# Altium PCB PCB_layout.PcbDoc
Units mil, origin at the board's own origin, x right, y up, seen from the top; angles counter-clockwise.
Board outline 2840 x 2445 mil, 2 copper layers (Top Layer, Bottom Layer); 26 components, 33 nets, 114 pads, 12 vias.
Unrouted connection lines stored in the file: 1.
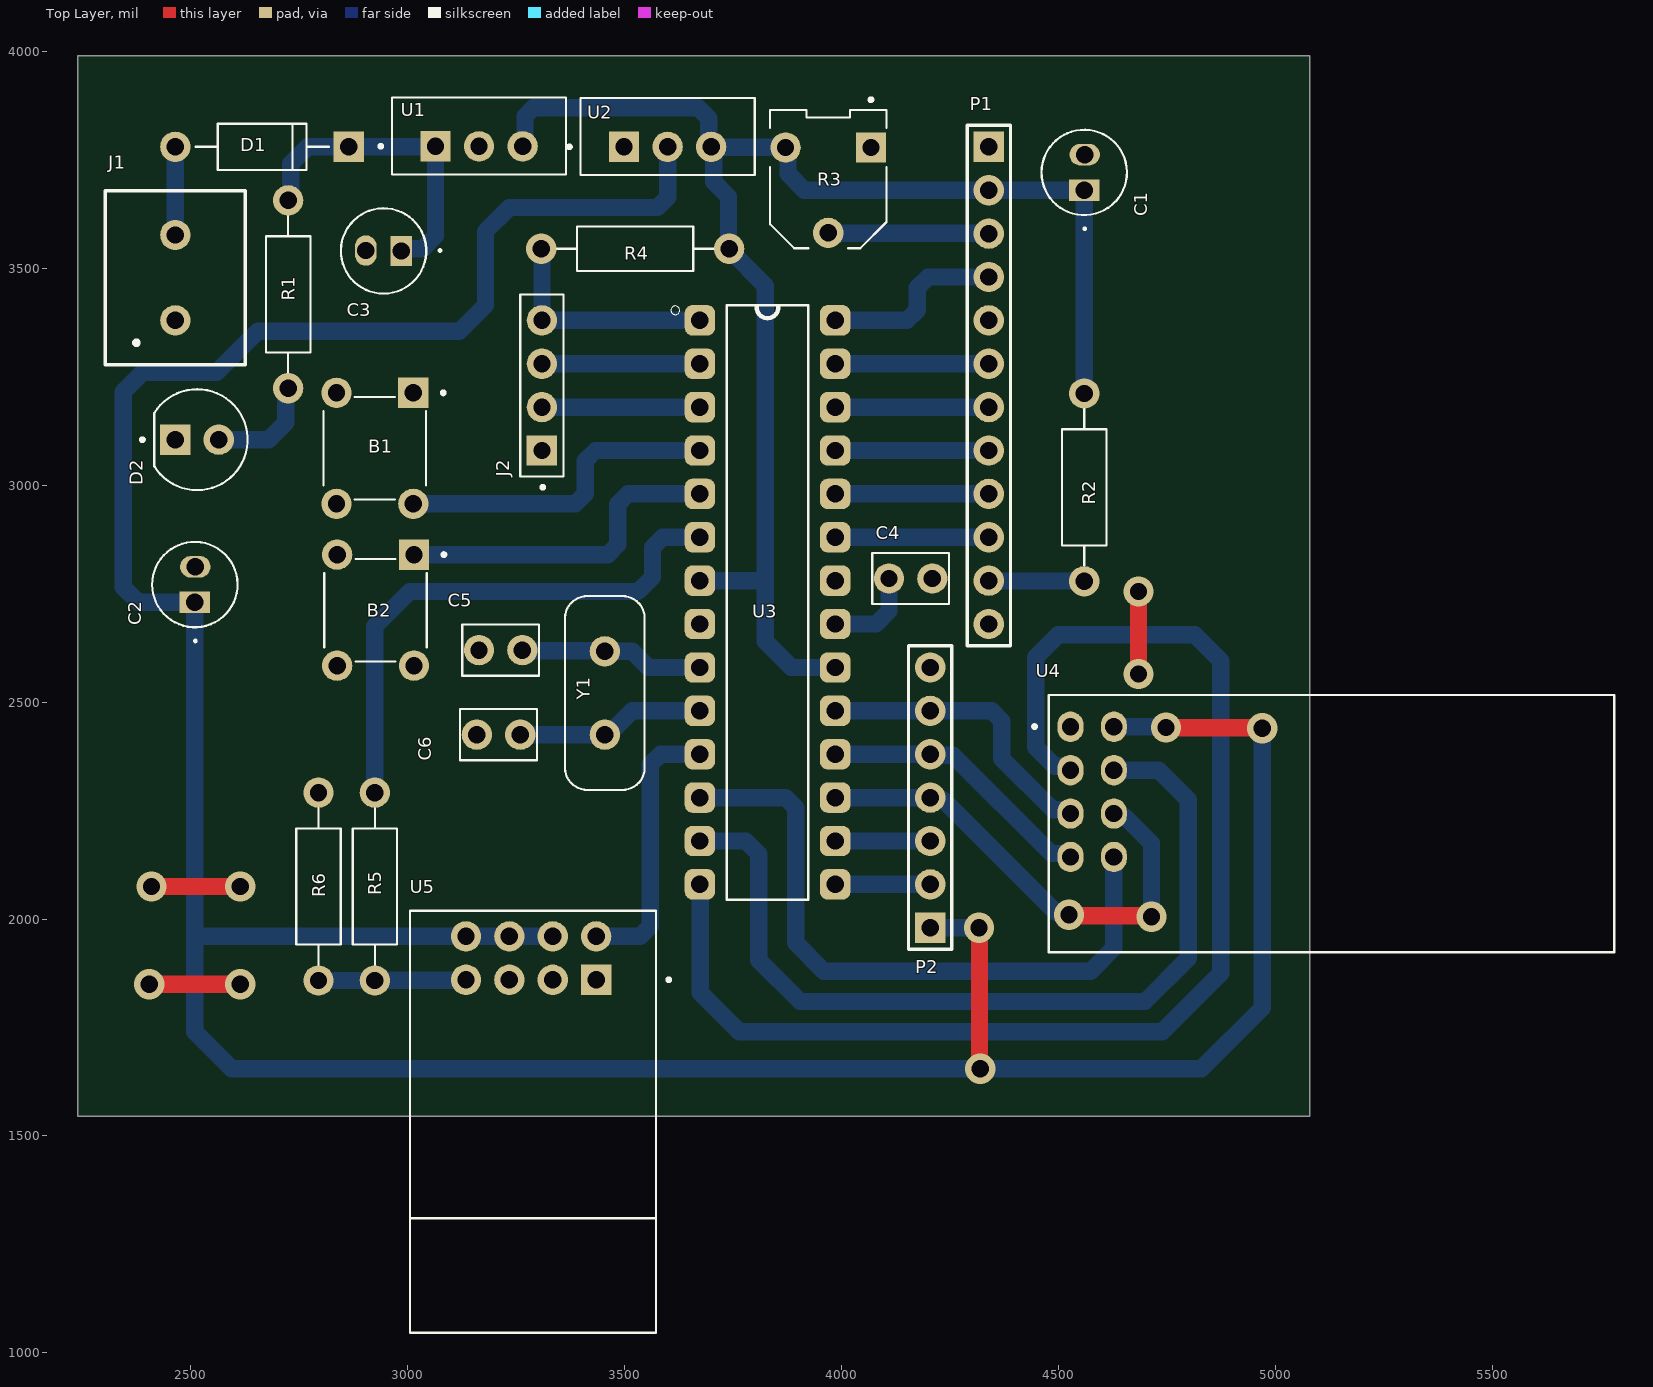
[diagram p0: Top Layer view]
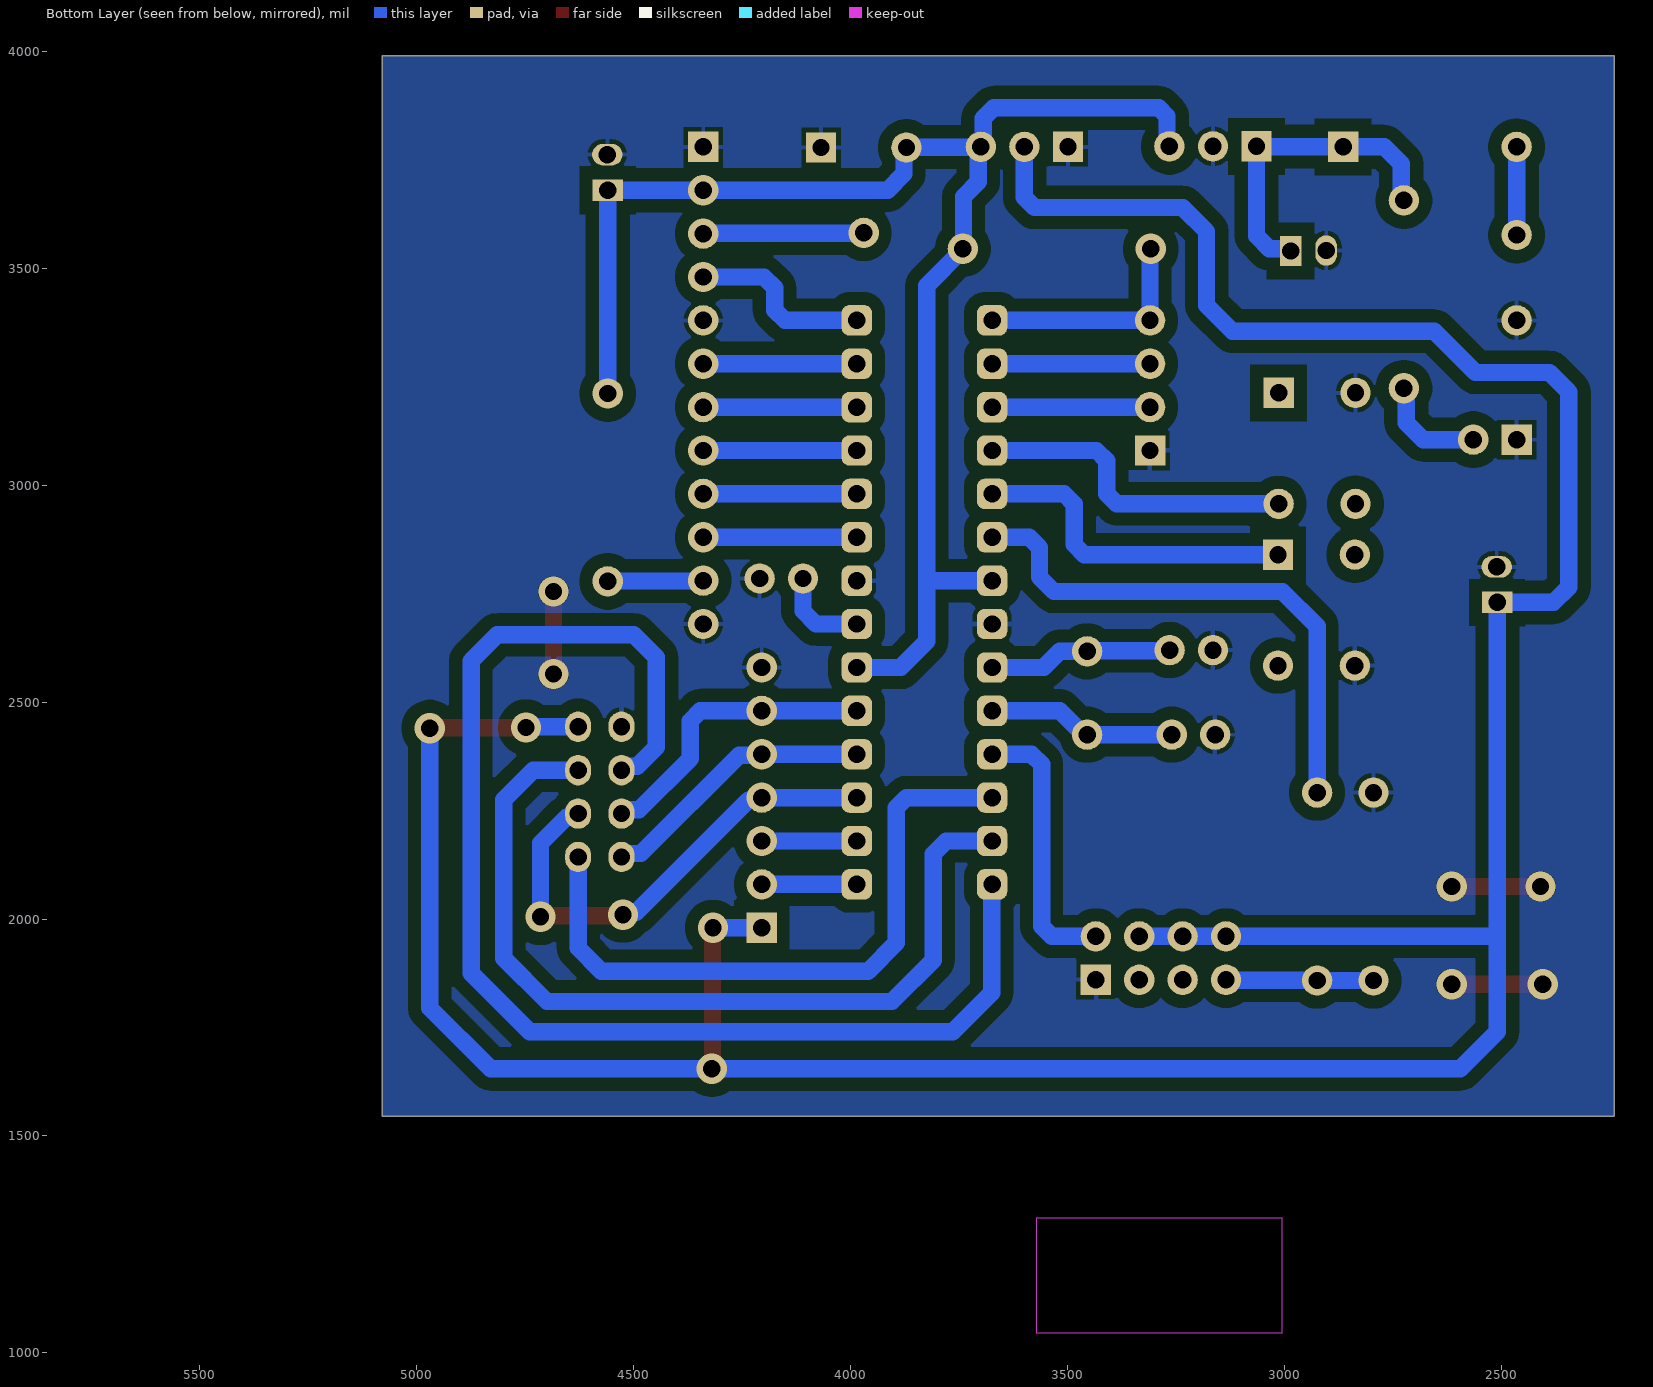
[diagram p1: Bottom Layer view, seen from below]
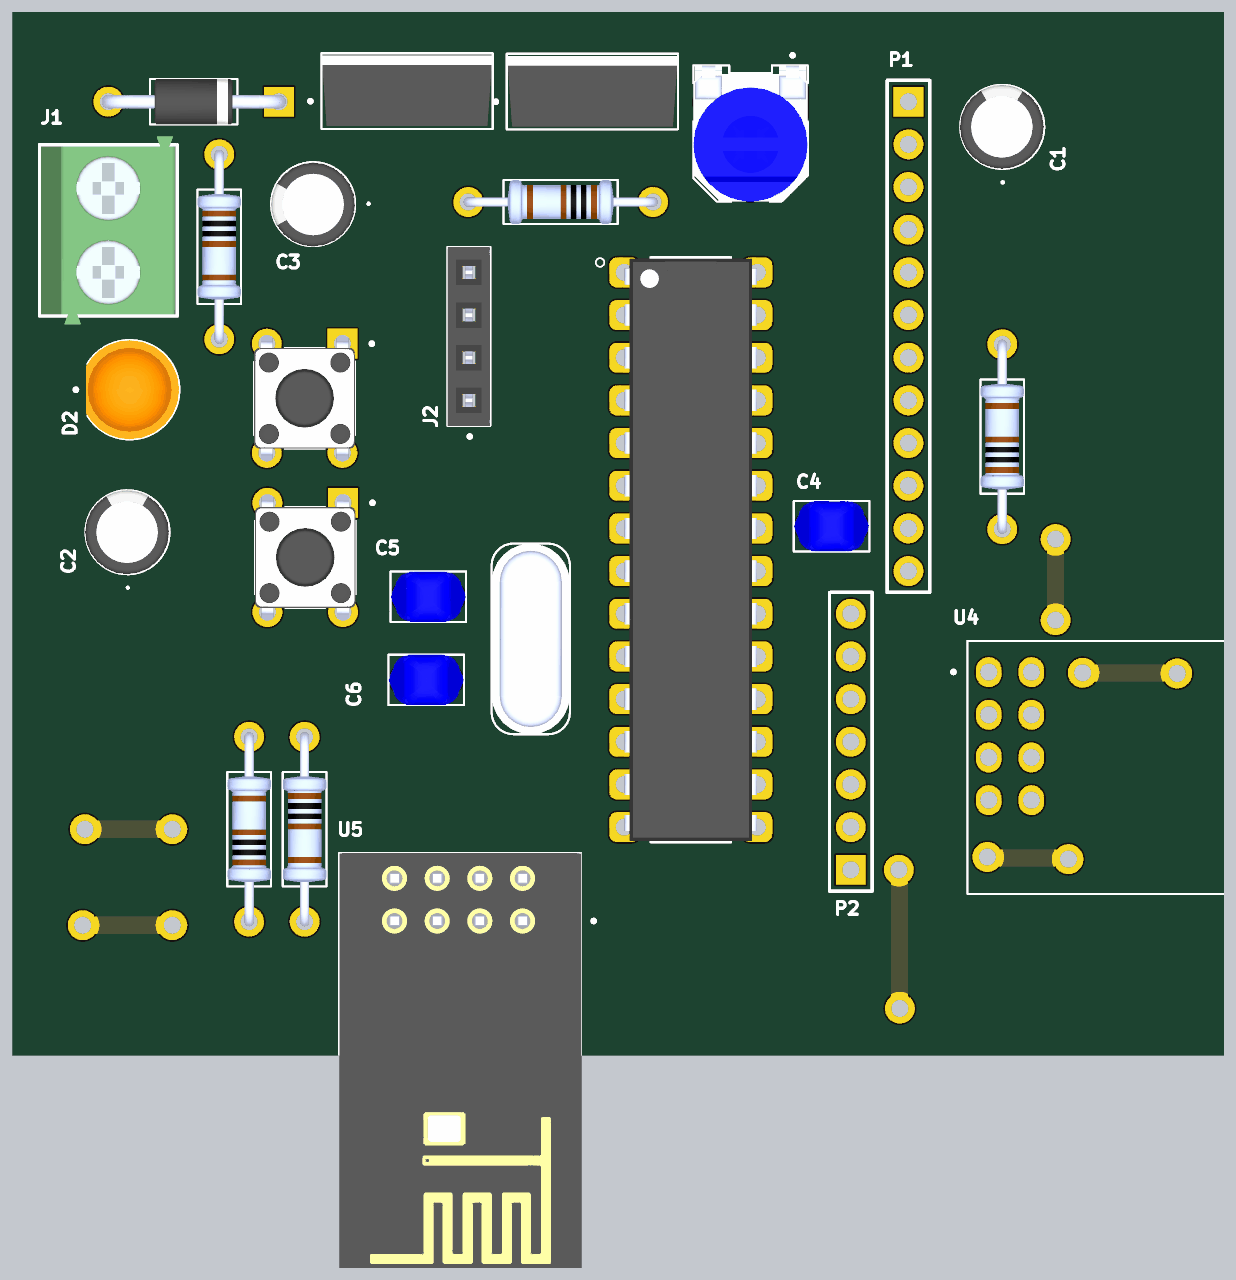
[diagram p2: 3D render of the assembled board from above, using the file's embedded part models]

## Layer stack, top to bottom
Top Solder: solder mask 0.4, Solder Resist, Dk 3.5
Top Layer: signal copper 1.4
Dielectric 1: dielectric 12.6, FR-4, Dk 4.8
Bottom Layer: signal copper 1.4
Bottom Solder: solder mask 0.4, Solder Resist, Dk 3.5

## Board outline
2240,1545 5080,1545 5080,3990 2240,3990

## Design rules (kind name [scope] priority, off if disabled: settings)
Clearance [All] p1: gap=30 ignorepadtopadclearanceinfootprint=FALSE
PolygonConnect [All] p1: connectstyle=Relief reliefconductorwidth=10 reliefentries=4 polygonreliefangle="90 Angle" airgapwidth=10
RoutingVias [All] p1: holewidth=40 width=70 viastyle="Through Hole" minholewidth=40 minwidth=70 maxholewidth=40 maxwidth=70
SolderMaskExpansion [All] p1: expansion=4 istentingtop=FALSE
Width [All] p1: maxlimit=50 minlimit=30 preferedwidth=40
30 further rules are at their usual default settings.

## Components (designator, comment, footprint, x,y, rotation, side; value= is the part's Value field where it differs from the comment)
B1 "Push button" SW_TS02-66-95-BK-260-LCR-D 2925,3085 r270 top
B2 "Push button" SW_TS02-66-95-BK-260-LCR-D 2926.42,2712.05 r270 top
C1 "10uF" CAPPRD500W50D500H1100 4560,3721 r90 top
C2 "10uF" CAPPRD500W50D500H1100 2510,2771 r90 top
C3 "100uF" CAPPRD500W50D500H1100 2945,3540 r180 top
C4 "100nF" CAPRB500W50L450T300H550 4110,2785 r0 top
C5 "22pF" CAPRB500W50L450T300H550 3265,2620 r180 top
C6 "22pF" CAPRB500W50L450T300H550 3260,2425 r180 top
D1 "1N4007" DIOAD1060W80L520D270 2665,3780 r180 top
D2 "L08R5000Q1" LEDRD254W57D500H1070 2515,3105 r0 top
J1 "TBlock 2" 691111710002 2465,3478.43 r90 top
J2 "Header 4" SULLINS_PPTC041LFBN-RC 3310,3230 r90 top
P1 "Header 12" HDR1X12 4340,3780 r270 top
P2 "Header 7" HDR1X7 4205,1980 r90 top
R1 "1k" RESAD1100W55L680D260 2725,3440 r90 top
R2 "220" RESAD1100W55L680D260 4560,2995 r270 top
R3 "1k" TRIM_3306F-1-105 3970,3680 r270 top
R4 "10k" RESAD1100W55L680D260 3525,3545 r0 top
R5 "1k1" RESAD1100W55L680D260 2925,2075 r90 top
R6 "2k2" RESAD1100W55L680D260 2795,2075 r270 top
U1 "LM7805" TO255P1020X450X1968-3 3165,3805 r0 top
U2 "LD1117V33" TO255P1020X450X1968-3 3599.61,3803.82 r0 top
U3 "ATMEGA328P-PU" DIP794W46P254L2967H457Q28B 3830,2730 r0 top
U4 "NRF24L01" XCVR_NRF24L01P-MODULE-PCB 5130,2220 r0 top
U5 "ESP8266-01/ESP-01" XCVR_ESP8266-01/ESP-01 3285,1532.83 r180 top
Y1 "16MHz" XTAL_ECS-160-20-4X 3455,2521.06 r270 top

## Footprints (in the part's own frame and the unit in brackets; to place one, negate y for a bottom-side part, rotate by r counter-clockwise, add the part's x,y. Pads: shape width x height; smd on the part's side, far side on the other; paste and mask are expansions set on the pad)
691111710002 [mil]
  round 70 hole 40: 1(-98.43,0) 2(98.43,0)
  silkscreen extent -201,-161 201,161, body extent -220,-157 220,157, height 434
CAPPRD500W50D500H1100 [mil]
  oval 50x70 hole 40: N(41,-1)
  rect 50x70 hole 40: P(-41,0)
  silkscreen extent -131,-98 98,98, body extent -108,-97 108,99, height 434
CAPRB500W50L450T300H550 [mil]
  round 70 hole 40: 1(0,0) 2(100,0)
  silkscreen extent -39,-59 139,59, body extent -38,-59 138,59, height 210
DIOAD1060W80L520D270 [mil]
  round 70 hole 40: A(200,0)
  rect 70x70 hole 40: C(-200,0)
  silkscreen extent -154,-53 154,53, body extent -216,-53 216,53, height 99
DIP794W46P254L2967H457Q28B [mil]
  rrect50% 70x70 hole 40: 1(-155.91,650) 2(-155.91,550) 3(-155.91,450) 4(-155.91,350) 5(-155.91,250) 6(-155.91,150) 7(-155.91,50) 8(-155.91,-50) 9(-155.91,-150) 10(-155.91,-250) 11(-155.91,-350) 12(-155.91,-450) 13(-155.91,-550) 14(-155.91,-650) 15(155.91,-650) 16(155.91,-550) 17(155.91,-450) 18(155.91,-350) 19(155.91,-250) 20(155.91,-150) 21(155.91,-50) 22(155.91,50) 23(155.91,150) 24(155.91,250) 25(155.91,350) 26(155.91,450) 27(155.91,550) 28(155.91,650)
  silkscreen extent -223,-685 94,685, body extent -156,-682 156,683, height 180
HDR1X7 [mil] "Connector; Header; 7 Position"
  rect 70x70 hole 40: 1(0,0)
  round 70 hole 40: 2(100,0) 3(200,0) 4(300,0) 5(400,0) 6(500,0) 7(600,0)
  silkscreen extent -50,-50 650,50
HDR1X12 [mil] "Connector; Header; 12 Position"
  rect 70x70 hole 40: 1(0,0)
  round 70 hole 40: 2(100,0) 3(200,0) 4(300,0) 5(400,0) 6(500,0) 7(600,0) 8(700,0) 9(800,0) 10(900,0) 11(1000,0) 12(1100,0)
  silkscreen extent -50,-50 1150,50
LEDRD254W57D500H1070 [mil]
  round 70 hole 40: A(50,0)
  rect 70x70 hole 40: C(-50,0)
  silkscreen extent -130,-116 116,116, body extent -102,-116 116,116, height 358
RESAD1100W55L680D260 [mil]
  round 70 hole 40: 1(-216.54,0) 2(216.54,0)
  silkscreen extent -180,-51 180,51, body extent -227,-51 227,51, height 101
SULLINS_PPTC041LFBN-RC [mil]
  rect 70x70 hole 40: 1(-150,0)
  round 70 hole 40: 2(-50,0) 3(50,0) 4(150,0)
  silkscreen extent -239,-50 210,50, body extent -210,-50 210,50, height 335
SW_TS02-66-95-BK-260-LCR-D [mil]
  rect 70x70 hole 40: 1(-127.95,88.58)
  round 70 hole 40: 2(127.95,88.58) 3(-127.95,-88.58) 4(127.95,-88.58)
  silkscreen extent -132,-118 118,162, body extent -156,-118 155,118, height 382
TO255P1020X450X1968-3 [mil]
  rect 70x70 hole 40: 1(-100.39,-23.82)
  round 70 hole 40: 2(0,-23.82) 3(100.39,-23.82)
  silkscreen extent -230,-89 201,89, body extent -200,-82 200,83, height 901
TRIM_3306F-1-105 [mil]
  rect 70x70 hole 40: 1(-98.43,98.43)
  round 70 hole 40: 2(98.43,0) 3(-98.43,-98.43)
  silkscreen extent -213,-134 134,134, body extent -185,-134 134,134, height 330
XCVR_ESP8266-01/ESP-01 [mil]
  rect 70x70 hole 40: 1(-150,-327.17)
  round 70 hole 40: 2(-50,-327.17) 3(50,-327.17) 4(150,-327.17) 5(-150,-427.17) 6(-50,-427.17) 7(50,-427.17) 8(150,-427.17)
  Keep-Out Layer region: 279.13,222.44 -287.8,222.44 -287.8,486.22 279.13,486.22
  silkscreen extent -321,-486 279,486, body extent -288,-486 278,486, height 256
XCVR_NRF24L01P-MODULE-PCB [mil]
  oval 60x70 hole 40: 1(-601.75,223.18) 2(-501.75,223.18) 3(-601.75,123.18) 4(-501.75,123.18) 5(-601.75,23.18) 6(-501.75,23.18) 7(-601.75,-76.82) 8(-501.75,-76.82)
  silkscreen extent -688,-296 652,296
XTAL_ECS-160-20-4X [mil]
  round 70 hole 40: 1(-96.06,0) 2(96.06,0)
  silkscreen extent -223,-92 223,92, body extent -223,-92 223,92, height 138

## Part data
C1 C2 C3: library part "Electrolytic capacitor", "FS-A", Package=None, Availability=Unavailable, MF="{'manufacturer': u'Panasonic'}", MP=EEUFS0J221B, Price=None
C4 C5 C6: library part "Ceramic capacitor", "2200 pF Â±10% 250V Ceramic Capacitor X7R Radial", Package="Radial TDK", Check_prices=https://www.snapeda.com/parts/FG24X7R2E222KNT06/TDK/view-part/?ref=eda, Digi-Key_Part_Number=445-173386-1-ND, MF=TDK, MP=FG24X7R2E222KNT06, Purchase-URL=https://pricing.snapeda.com/search/part/FG24X7R2E222KNT06/?ref=eda, SnapEDA_Link=https://www.snapeda.com/parts/FG24X7R2E222KNT06/TDK/view-part/?ref=snap
D1: "Diode Switching 1KV 1A 2-Pin DO-41", Package=None, Availability=Unavailable, MP=1N4007, Price=None
D2: library part LED, "LED, Orange, Through Hole, T-1 3/4 (5mm), 30 mA, 2.1 V, 635 nm", Package=None, Availability=Unavailable, MF="{'manufacturer': u'LED Technology'}", MP=L08R5000Q1, Price=None
J1: library part "Terminal Block - 2Pins", "2 Position Wire to Board Terminal Block Horizontal with Board 0.197 _5.00mm_ Through Hole", Package=None, Availability=Unavailable, MF="Wurth Electronics", MP=691111710002, Price=None, SnapEDA_Link=https://www.snapeda.com/parts/691111710002/Wurth%20Electronics%20Inc./view-part/1195092/?ref=snap
J2: library part "Female header - 4Pins", "4 Position Header Connector Through Hole", Package=None, Availability=Warning, Check_prices=https://www.snapeda.com/parts/PPTC041LFBN-RC/Sullins%20Connector%20Solutions/view-part/285917/?ref=eda, MF="Sullins Connector", MP=PPTC041LFBN-RC, Price=None, Purchase-URL=https://pricing.snapeda.com/search/part/PPTC041LFBN-RC/?ref=eda, SnapEDA_Link=https://www.snapeda.com/parts/PPTC041LFBN-RC/Sullins%20Connector%20Solutions/view-part/285917/?ref=snap
P1: "Header, 12-Pin", LatestRevisionDate=17-Jul-2002, LatestRevisionNote="Re-released for DXP Platform.", Publisher="Altium Limited"
P2: "Header, 7-Pin", LatestRevisionDate=17-Jul-2002, LatestRevisionNote="Re-released for DXP Platform.", Publisher="Altium Limited"
R1 R2 R4 R5 R6: library part "Resistor (0.25W)", "(MFR-25FBF52-10K) 10,2 kOhm bei 1% 0,25W, 1/4W Durchbohrlochwiderstand Axial Metal Film", Package="Axial Yageo", Digi-Key_Part_Number=10.2KXBK-ND, MF=Yageo, MP=MFR-25FBF52-10K, Purchase-URL=https://pricing.snapeda.com/search/part/MFR-25FBF52-10K/?ref=eda, SnapEDA_Link=https://www.snapeda.com/parts/MFR-25FBF52-10K/Yageo/view-part/424333/?ref=snap
R3: library part Potentiometer1, "(3306F-1-105) 1 MOhms 0.2W, 1/5W PC Pins Through Hole Trimmer Potentiometer Cermet 1 Turn Top Adjustment", Package="3306F Bourns", Availability=Good, Check_prices=https://www.snapeda.com/parts/3306F-1-105/Bourns%20-%20J.W.%20Miller/view-part/862876/?ref=eda, MF=Bourns, MP=3306F-1-105, Price=None, Purchase-URL=https://pricing.snapeda.com/search/part/3306F-1-105/?ref=eda, SnapEDA_Link=https://www.snapeda.com/parts/3306F-1-105/Bourns%20-%20J.W.%20Miller/view-part/862876/?ref=snap
U1: library part LM78__, Package=None, Availability=Unavailable, MP=LM7805CT/NOPB, Price=None
U2: Package=None, Availability=Unavailable, MP=LD1117V33, Price=None
U3: "ATmega Series 20 MHz 32 KB Flash 2 KB SRAM 8-Bit Microcontroller - DIP-28", Package=None, Availability=Unavailable, MP=ATMEGA328P-PU, Price=None
U4: library part NRF24L01P-MODULE-PCB, "- Transceiver For Use With nRF24L01+", Package=None, Availability=Bad, MF="Nordic Semiconductor", Mouser-Purchase-URL=https://snapeda.com/shop?store=Mouser&id=230534, MP=NRF24L01P-MODULE-PCB, Price=None, SnapEDA_Link=https://www.snapeda.com/parts/NRF24L01P-MODULE-PCB/Nordic%20Semiconductor%20ASA/view-part/230534/?ref=snap
U5: library part "ESP8266-01 Module", "MakerFocus 4pcs ESP8266 ESP-01 Serial Wireless WiFi Transceiver Receiver Module 1MB SPI Flash DC3.0-3.6V Internet of Things WiFi Module Board Compatible with Ar duino", Package=None, Availability=Unavailable, MP=ESP8266-01/ESP-01, Price=None
Y1: library part "Crystal oscilator", "CRYSTAL T/H", Package=None, Availability=Unavailable, MF="{'manufacturer': u'ECS Inc.'}", MP=ECS-160-S-4, Price=None

## Via types
v1: diameter 70, hole 40, Top Layer to Bottom Layer, 12 vias

## Nets (pads, with @x,y where several pads share a name; then routed paths per layer and width w, separated by ;. In a path a pad name is that pad's centre, name@x,y a point inside that pad or via, vN(x,y) a via of type N, cw(c..) or ccw(c..) an arc to the next point about the centre after c; other vN are vias at no path point)
+3V3: C2.P P2.1 U2.2 U4.2 U5.6 U5.7 U5.8 | length 8085.1
  Top Layer w40: v1(4317.5,1980) 4318.75,1978.75 4318.75,1656.25 v1(4320,1655) ; v1(4748.41,2441.59) 4749.2,2440.8 4969.2,2440.8 v1(4970,2440)
  Bottom Layer w40: U5.6 U5.7 U5.8 2515,1960 2510,1965 ; U2.2 3599.61,3663.43 3576.17,3640 3235,3640 3180,3585 3180,3415 3120,3355 2655,3355 2560,3260 2390,3260 2345,3215 2345,2765 2380,2730 C2.P 2510,1965 ; P2.1 v1(4317.5,1980) ; U4.2 4746.81,2443.18 v1(4748.41,2441.59) v1@4750,2440 ; v1(4970,2440) 4970,1795 4830,1655 v1(4320,1655) 2595,1655 2510,1740 2510,1965
button1: B1.2 U3.4 | length 756
  Bottom Layer w40: B1.2 3386.57,2957.05 3410,2980.48 3410,3056.57 3433.43,3080 U3.4
button2: B2.1 U3.5 | length 771.6
  Bottom Layer w40: B2.1 3461.57,2840 3485,2863.43 3485,2956.57 3508.43,2980 U3.5
CE: U3.14 U4.3 | length 3045.8
  Bottom Layer w40: U3.14 3675,2079.09 3675,1830 3765,1740 4740,1740 4875,1875 4875,2595 4815,2655 4500,2655 4448.25,2603.25 4448.25,2395.82 4492.06,2352.01 4519.43,2352.01 U4.3
CSN: U3.13 U4.4 | length 2029.1
  Bottom Layer w40: U3.13 3780,2180 3810,2150 3810,1905 3905,1810 4700,1810 4800,1910 4800,2275 4731.82,2343.18 U4.4
D4: P1.7 U3.26 | length 354.1
  Bottom Layer w40: U3.26 P1.7
D5: P1.8 U3.25 | length 354.1
  Bottom Layer w40: U3.25 P1.8
D6: P1.9 U3.24 | length 354.1
  Bottom Layer w40: U3.24 P1.9
D7: P1.10 U3.23 | length 354.1
  Bottom Layer w40: U3.23 P1.10
EN: P1.6 U3.27 | length 354.1
  Bottom Layer w40: U3.27 P1.6
ESP_Rx: R5.2 U3.6 | length 1257.4
  Bottom Layer w40: R5.2 2925,2675 3005,2755 3531.57,2755 3565,2788.43 3565,2856.57 3588.43,2880 U3.6
ESP_Tx: U3.11 U5.5 | length 631.6
  Bottom Layer w40: U5.5 3536.57,1960 3560,1983.43 3560,2356.57 3583.43,2380 U3.11
GND: B1.3 B2.4 C1.N C2.N C3.N C4.2 C5.2 C6.2 D2.C J1.1 J2.1 P1.1 P1.5 P1.12 P2.7 R3.1 R6.1 U1.2 U2.1 U3.8 U3.22 U4.1 U5.1 | length 605
  Top Layer w40: v1(2405,1850) v1(2615,1850) ; v1(2410,2075) v1(2615,2075) ; v1(4685,2565) v1(4685,2755)
IRQ: U3.12 U4.8 | length 1534.3
  Bottom Layer w40: U3.12 3871.57,2280 3895,2256.57 3895,1945 3960,1880 4575,1880 4628.25,1933.25 U4.8
MISO: P2.5 U3.18 U4.7 | length 640.4
  Bottom Layer w40: U3.18 P2.5 4207.18,2377.82 4257.18,2377.82 4483.89,2151.11 4520.33,2151.11 U4.7
MOSI: P2.4 U3.17 U4.6 | length 1127.7
  Top Layer w40: v1(4525,2010) 4527.5,2007.5 4712.5,2007.5 v1(4715,2005)
  Bottom Layer w40: U3.17 P2.4 4210.74,2274.26 4235.74,2274.26 4494.26,2015.74 4519.26,2015.74 v1(4525,2010) ; U4.6 4637.07,2234.36 4655.21,2234.36 4715,2174.57 v1(4715,2005)
NetC3_P: C3.P D1.C R1.2 U1.1 | length 736.7
  Bottom Layer w40: R1.2 2730.74,3662.28 2730.74,3740.74 2770,3780 D1.C 2865.59,3780.59 3064.02,3780.59 U1.1 3064.61,3574.61 3035,3545 2991,3545 C3.P
NetC4_1: C4.1 U3.21 | length 211.5
  Bottom Layer w40: U3.21 4080,2680 4110,2710 C4.1
NetD1_A: D1.A J1.2 | length 203.1
  Bottom Layer w40: J1.2 D1.A
NetD2_A: D2.A R1.1 | length 252.1
  Bottom Layer w40: D2.A 2680,3105 2719.26,3144.26 2719.26,3217.72 R1.1
NetJ2_2: J2.2 U3.3 | length 364.1
  Bottom Layer w40: J2.2 U3.3
NetJ2_3: J2.3 U3.2 | length 364.1
  Bottom Layer w40: J2.3 U3.2
NetP1_3: P1.3 R3.2 | length 370.7
  Bottom Layer w40: R3.2 3970.79,3580.79 4339.21,3580.79 P1.3
NetP1_11: P1.11 R2.2 | length 220.3
  Bottom Layer w40: P1.11 4340.77,2779.23 R2.2@4560,2779.23
NetR5_1: R5.1 R6.2 U5.4 | length 340.6
  Bottom Layer w40: R6.2 R5.1 2925.77,1859.23 3134.23,1859.23 U5.4
reset: J2.4 R4.1 U3.1 | length 529.1
  Bottom Layer w40: R4.1@3310,3545 J2.4 U3.1
RS: P1.4 U3.28 | length 425.7
  Bottom Layer w40: U3.28 4151.57,3380 4175,3403.43 4175,3455 4200,3480 P1.4
RST: P2.2 U3.15 | length 219.1
  Bottom Layer w40: U3.15 P2.2
SCK: P2.6 U3.19 U4.5 | length 691.1
  Bottom Layer w40: U3.19 P2.6 4346.57,2480 4370,2456.57 4370,2370 4487.99,2252.01 4519.43,2252.01 U4.5
SDA: P2.3 U3.16 | length 219.1
  Bottom Layer w40: U3.16 P2.3
VCC: C1.P P1.2 R2.1 R3.3 R4.2 U1.3 U2.3 U3.7 U3.20 | length 3505
  Bottom Layer w40: U1.3 3271.13,3786.92 3271.13,3851.13 3290,3870 3670,3870 3694.26,3845.74 3694.26,3785.74 U2.3 U2.3@3700.79,3779.21 ; U3.7 3815,2780 3825,2770 ; U3.20 3885,2580 3825,2640 3825,2770 ; C1.P@4550,3680 P1.2 3915,3680 3877.32,3717.68 3877.32,3772.68 R3.3 3870.79,3779.21 U2.3@3700.79,3779.21 ; R2.1 C1.P ; U2.3@3700.79,3779.21 3705.74,3774.26 3705.74,3699.26 3740,3665 3740,3545 3825,3460 3825,2770
xtal1: C5.1 U3.9 Y1.1 | length 425.7
  Bottom Layer w40: C5.1 3266.44,2618.56 3453.56,2618.56 Y1.1 3517.87,2617.13 3555,2580 U3.9
xtal2: C6.1 U3.10 Y1.2 | length 436.9
  Bottom Layer w40: C6.1 3463.12,2425 3518.12,2480 U3.10
pads on no net: B1.1 B1.4 B2.2 B2.3 U5.2 U5.3

## Polygon pours and split planes (outlines as drawn)
GND on Bottom Layer "GND_L02_P000" (solid, pour order 0): 2240,3990 2240,1545 5080,1545 5080,3990